# Altium PCB LMP9100.PcbDoc
Units mil, origin at the board's own origin, x right, y up, seen from the top; angles counter-clockwise.
Board outline 1322.96 x 990 mil, 4 copper layers (Top Layer, Int1 (GND), Int2 (PWR), Bottom Layer), stack 53.912 mil thick; 29 components, 32 nets, 136 pads, 44 vias.
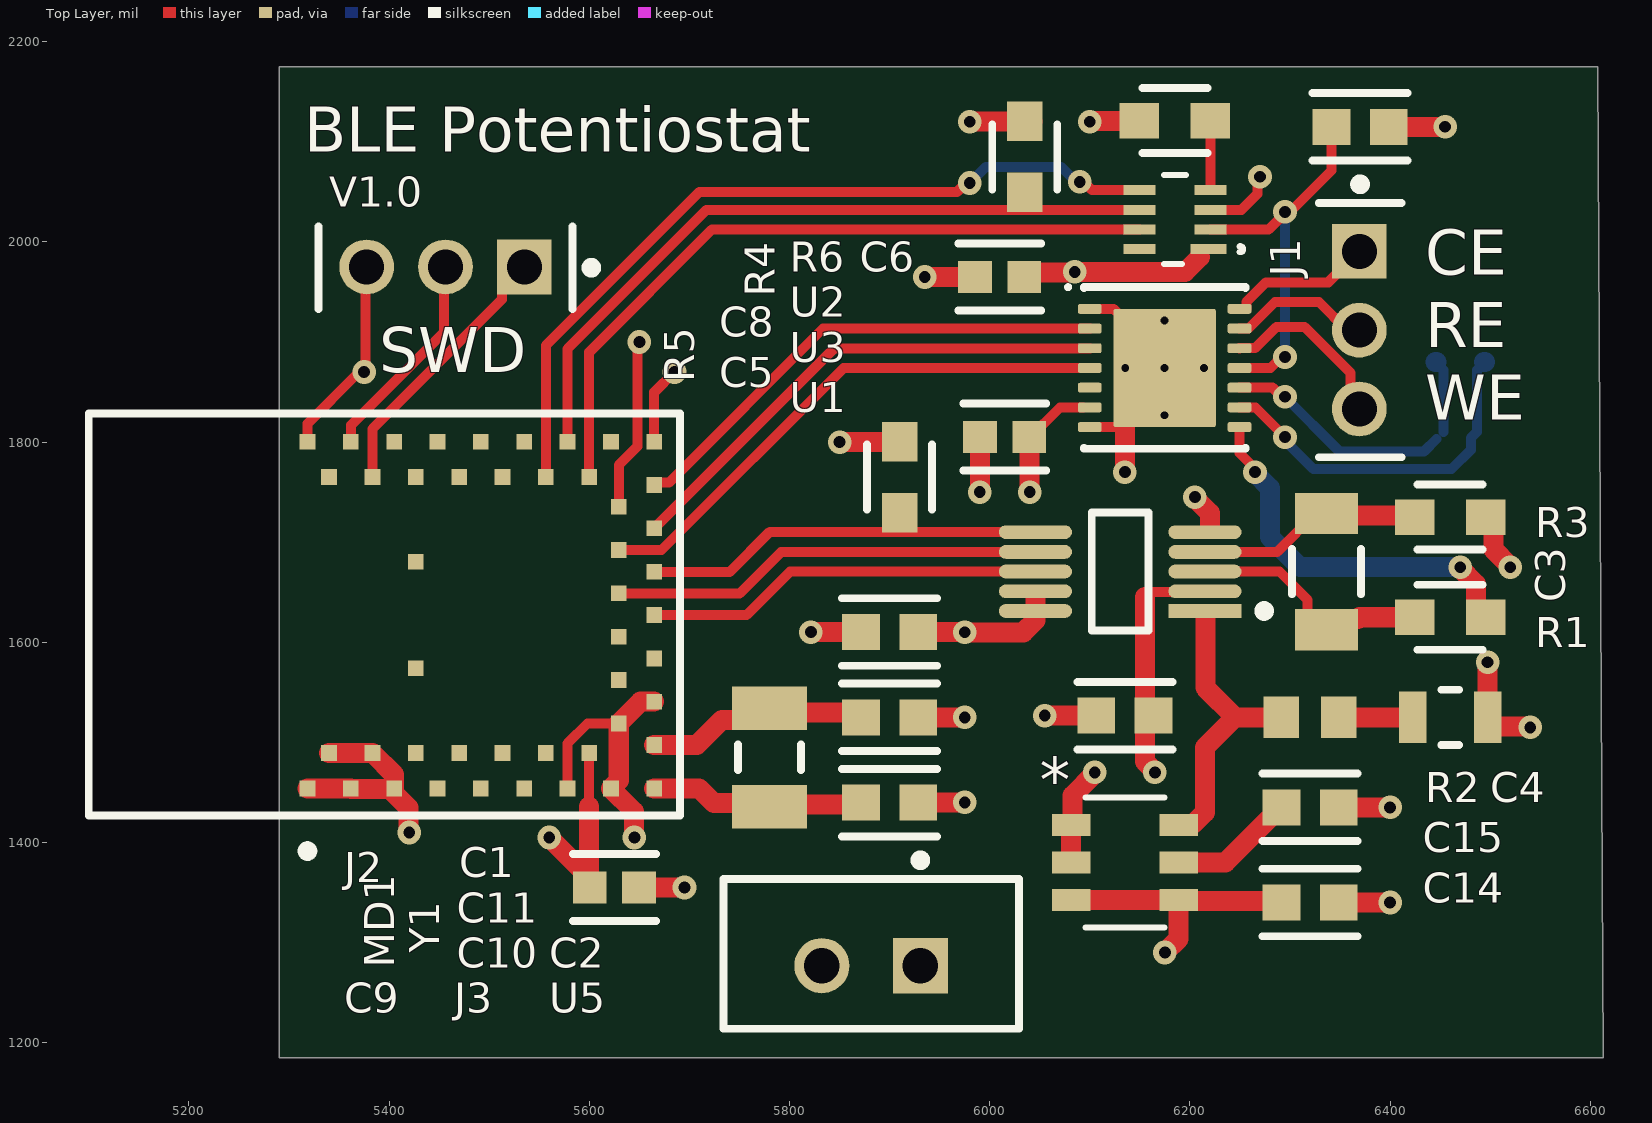
[diagram p0: Top Layer view]
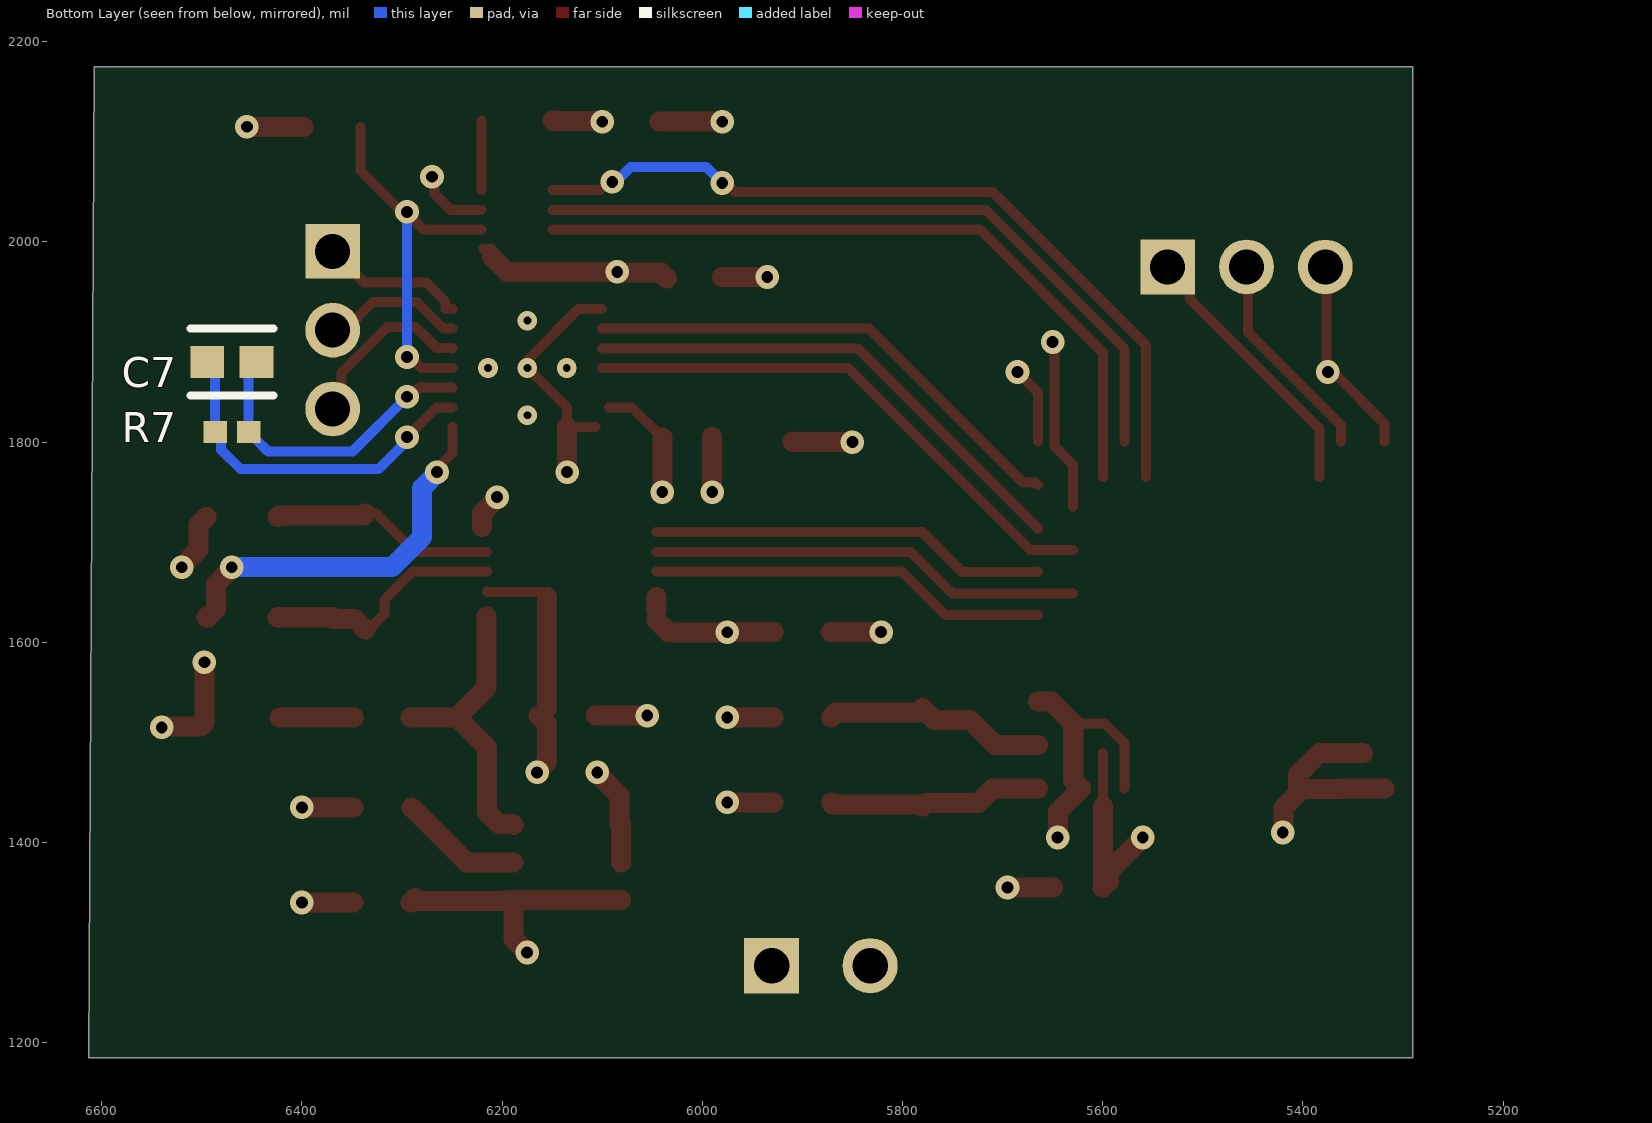
[diagram p1: Bottom Layer view, seen from below]
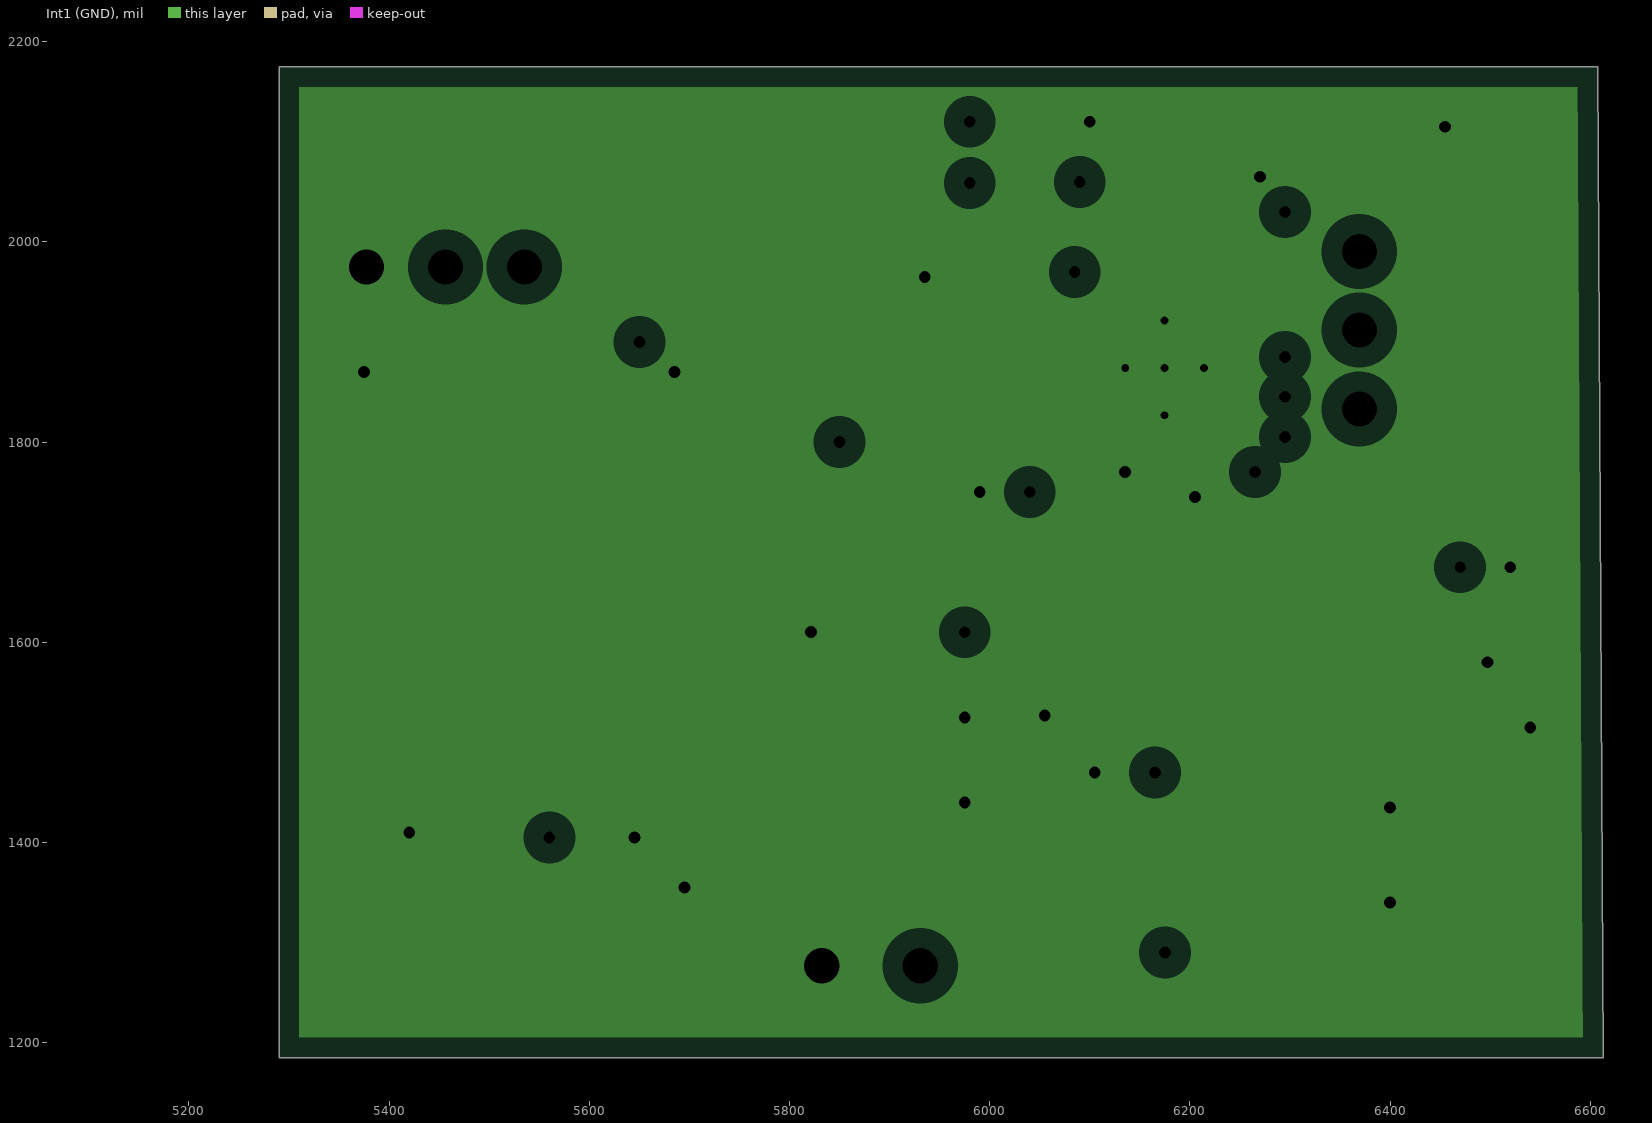
[diagram p2: Int1 (GND), clearances drawn from the general rule]
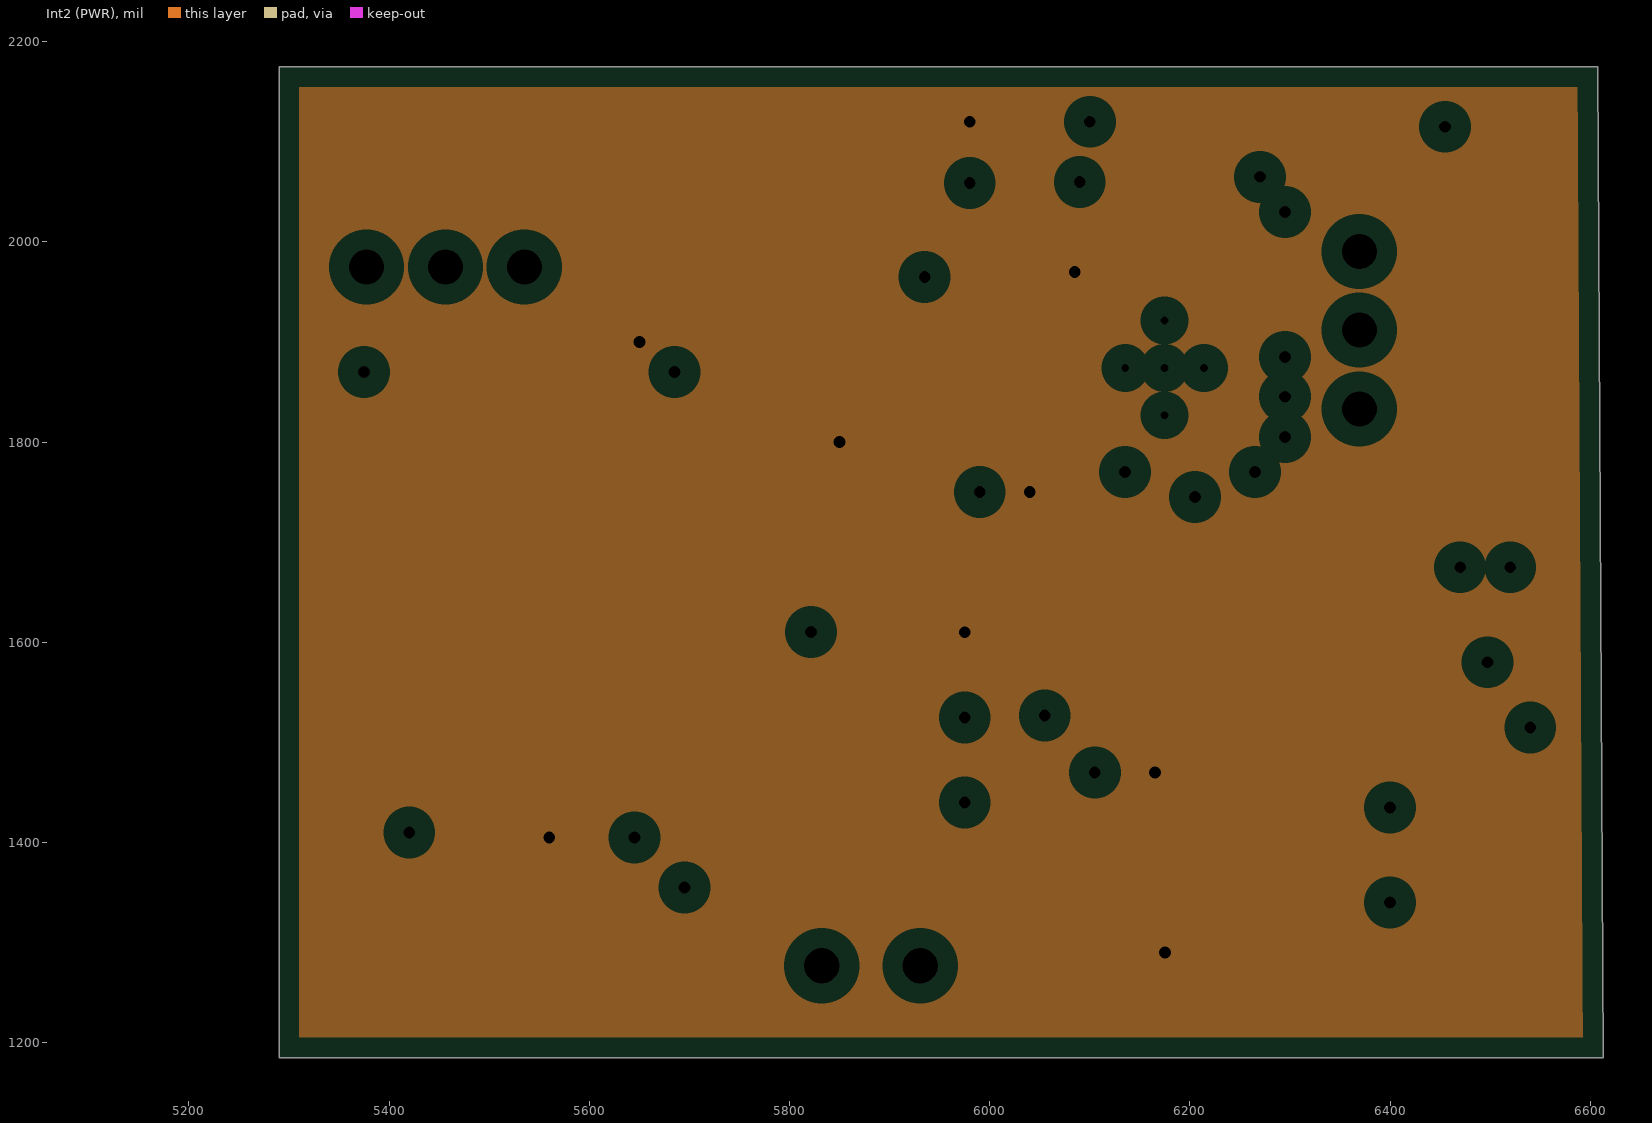
[diagram p3: Int2 (PWR), clearances drawn from the general rule]
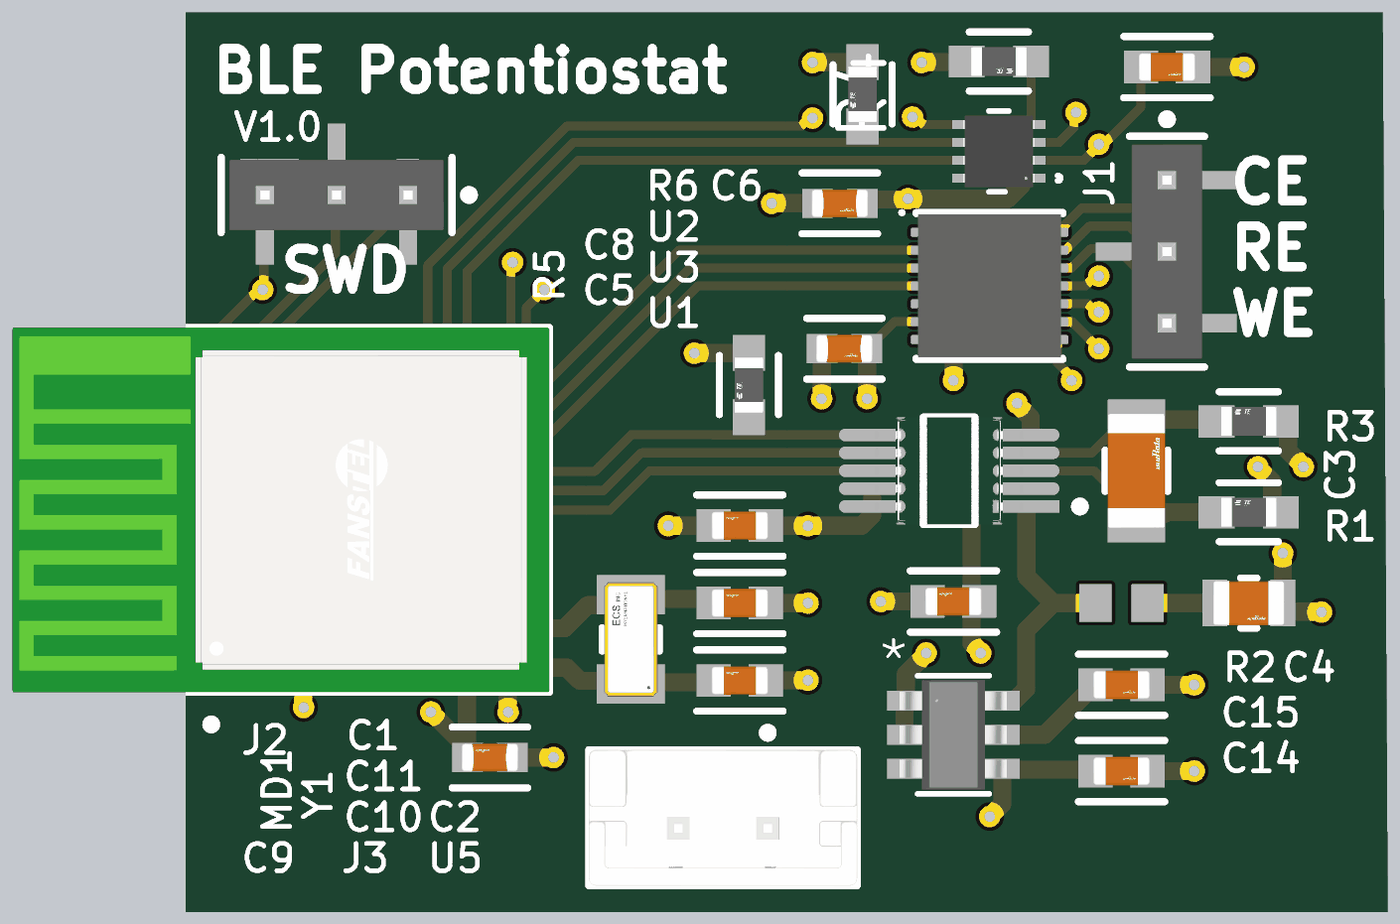
[diagram p4: 3D render of the assembled board from above, using the file's embedded part models]

## Layer stack, top to bottom
Top Solder: solder mask 1, SM-001, Dk 4
Top Layer: signal copper 1.378
Dielectric 1: prepreg 5.1, PP-017, Dk 4.3
Dielectric 2: prepreg 5.1, PP-017, Dk 4.3
Int1 (GND): plane copper 1.378, net GND
Dielectric 3: core 28, Core-039, Dk 4.8
Int2 (PWR): plane copper 1.378, net VCC
Dielectric 4: prepreg 5.1, PP-017, Dk 4.3
Dielectric 5: prepreg 5.1, PP-017, Dk 4.3
Bottom Layer: signal copper 1.378
Bottom Solder: solder mask 1, SM-001, Dk 4

## Board outline
6612.96,1185 5290,1185 5290,2175 6607.43,2175

## Design rules (kind name [scope] priority, off if disabled: settings)
Clearance [All] p1: gap=4 ignorepadtopadclearanceinfootprint=TRUE except(5: Arc-Via Track-Via SMDPad-Via THPad-Via Via-Via Via-Fill Via-Poly Via-Region Via-Text; 10: Arc-Hole Track-Hole SMDPad-Hole THPad-Hole Via-Hole Fill-Hole Poly-Hole Region-Hole Text-Hole)
MinimumSolderMaskSliver [All] p1: minsoldermaskwidth=8
PlaneClearance [All] p1: clearance=20
PlaneConnect [All] p1: planeconnectstyle=Relief reliefexpansion=20 reliefentries=4 reliefconductorwidth=10 reliefairgap=10
PolygonConnect [All] p1: connectstyle=Relief reliefconductorwidth=10 reliefentries=4 polygonreliefangle="90 Angle" airgapwidth=10
RoutingVias [All] p1: holewidth=28 width=50 viastyle="Through Hole" minholewidth=28 minwidth=50 maxholewidth=28 maxwidth=50
SolderMaskExpansion [All] p1: expansion=4 istentingtop=FALSE
Width [All] p1: maxlimit=20 minlimit=6 preferedwidth=10 minimp=50.000000 maximp=50.000000 favimp=50.000000
27 further rules are at their usual default settings.

## Classes and differential pairs
component class Power: C14 C15 J3 U5
component class MCU: C9 C10 C11 J2 MD1 Y1
component class Analog: C1 C2 C3 C4 C5 C6 C7 C8 J1 R1 R2 R3 R4 R5 R6 R7 U1 U2 U3

## Components (designator, comment, footprint, x,y, rotation, side; value= is the part's Value field where it differs from the comment)
C1 "1u" FP-GCM188-0_1-IPC_B 5900,1610.29 r180 top
C2 "1u" FP-GCM188-0_1-IPC_B 6135,1526.7 r180 top
C3 "0.1u (NPO)" FP-GRM319-0_15-MFG 6336.36,1670.63 r90 top
C4 "10u" FP-GRM21B-0_15-MFG 6460,1525 r0 top
C5 "0.1u (X7R)" FP-GCJ188-0_2-IPC_C 6015,1805 r0 top
C6 "1u" FP-GCM188-0_1-IPC_B 6370,2115 r0 top
C7 "(C)" FP-GCJ188-0_2-IPC_C 6470,1880 r180 bottom
C8 "0.1u (X7R)" FP-GCJ188-0_2-IPC_C 6010,1965 r0 top
C9 "0.1u (X7R)" FP-GCJ188-0_2-IPC_C 5625,1355 r180 top
C10 "12p" FP-GCM188-0_1-IPC_B 5900,1439.71 r180 top
C11 "12p" FP-GCM188-0_1-IPC_B 5900,1525 r180 top
C14 "1u" FP-GCM188-0_1-IPC_B 6320,1340 r0 top
C15 "1u" FP-GCM188-0_1-IPC_B 6320,1435.03 r0 top
J1 "TMM-103-03-T-S" FP-TMM-103-03-T-S-MFG 6370,1911.84 r270 top
J2 "TMM-103-03-T-S" FP-TMM-103-03-T-S-MFG 5456.26,1974.21 r180 top
J3 "B2B-EH-A(LF)(SN)" FP-B2B-EH-A_LF_SN-MFG 5881.48,1288.71 r180 top
MD1 "BM832A" FP-BM832A-MFG 5395.12,1627.6 r90 top
R1 "10k" FP-CPF0603-MFG 6460,1625 r0 top value=10KΩ
R2 "0.47" RESC1608X55X30ML15T15 6320,1525 r180 top
R3 "10k" FP-CPF0603-MFG 6460,1725 r0 top value=10KΩ
R4 "10k" FP-CPF0603-MFG 6035,2085 r90 top value=10KΩ
R5 "10k" FP-CPF0603-MFG 5910,1765 r90 top value=10KΩ
R6 "10k" FP-CPF0603-MFG 6185,2121.12 r180 top value=10KΩ
R7 "(R)" RESC1005X40X25NL05T10 6470,1810 r180 bottom
U1 "ADS8866IDGSR" FP-DGS0010A-IPC_A 6130.32,1670.63 r180 top
U2 "DAC80501MDQFR" WSON8_2P1X2P1_TEX 6185,2022.2 r180 top
U3 "LMP91000SDE/NOPB" NHL0014B_V 6174.74,1874.06 r0 top
U5 "PREF35125QDBVR" SOT23_DBV_TEX 6135,1380 r0 top
Y1 "32.7 kHz" FP-ECS-CDX-MFG 5780,1485 r90 top

## Footprints (in the part's own frame and the unit in brackets; to place one, negate y for a bottom-side part, rotate by r counter-clockwise, add the part's x,y. Pads: shape width x height; smd on the part's side, far side on the other; paste and mask are expansions set on the pad)
FP-B2B-EH-A_LF_SN-MFG [mm]
  rect 1.4x1.4 hole 0.9 paste-2539.97 mask+0: 1(-1.25,0.3)
  round 1.4 hole 0.9 paste-2539.97 mask+0: 2(1.25,0.3)
  silkscreen extent -3.75,-2.5 3.75,1.9, body extent -3.75,-1.9 3.75,1.9, height 6
FP-BM832A-MFG [mm]
  rect 0.4x0.4 smd paste+0 mask+0: 1(-4.41,1.95) 2(-3.51,1.4) 3(-4.41,0.85) 4(-3.51,0.3) 5(-4.41,-0.25) 6(-3.51,-0.8) 7(-4.41,-1.35) 8(-3.51,-1.9) 9(-4.41,-2.45) 10(-3.51,-3) 11(-4.41,-3.55) 12(-3.51,-4.1) 13(-4.41,-4.65) 14(-3.51,-5.2) 15(-4.41,-5.75) 16(-4.41,-6.85) 17(-3.31,-6.85) 18(-2.76,-5.95) 19(-2.21,-6.85) 20(-1.66,-5.95) 21(-1.11,-6.85) 22(-0.56,-5.95) 23(-0.01,-6.85) 24(0.54,-5.95) 25(1.09,-6.85) 26(1.64,-5.95) 27(2.19,-6.85) 28(2.74,-5.95) 29(3.29,-6.85) 30(4.39,-6.85) 31(4.39,-5.75) 32(3.49,-5.2) 33(4.39,-4.65) 34(3.49,-4.1) 35(4.39,-3.55) 36(3.49,-3) 37(4.39,-2.45) 38(3.49,-1.9) 39(4.39,-1.35) 40(3.49,-0.8) 41(4.39,-0.25) 42(3.49,0.3) 43(4.39,0.85) 44(3.49,1.4) 45(4.39,1.95) 46(1.34,-0.8) 47(-1.36,-0.8)
  silkscreen extent -6.12,-7.5 5.1,7.5, body extent -5.6,-8 5.6,8, height 0.25
FP-CPF0603-MFG [mm]
  rect 1x0.9 smd paste+0 mask+0: 1(-0.9,0) 2(0.9,0)
  silkscreen extent -0.82,-0.82 0.82,0.82, body extent -1.5,-0.55 1.5,0.55, height 0.25
FP-DGS0010A-IPC_A [mm]
  rect 1.857x0.35 smd paste+0 mask+0: 1(-2.151,1)
  rrect100% 1.857x0.35 smd paste+0 mask+0: 2(-2.151,0.5) 3(-2.151,0) 4(-2.151,-0.5) 5(-2.151,-1) 6(2.151,-1) 7(2.151,-0.5) 8(2.151,0) 9(2.151,0.5) 10(2.151,1)
  silkscreen extent -3.78,-1.5 0.72,1.5, body extent -3.58,-2 3.58,2, height 0.25
FP-ECS-CDX-MFG [mm]
  rect 1.1x1.9 smd paste+0 mask+0: 1(-1.25,0) 2(1.25,0)
  silkscreen extent -0.33,-0.8 0.33,0.8, body extent -1.9,-1.05 1.9,1.05, height 0.25
FP-GCJ188-0_2-IPC_C [mil]
  rect 33.67x31.97 smd paste+0 mask+0: 1(-24.63,0) 2(24.63,0)
  silkscreen extent -41,-33 41,33, body extent -31,-16 31,16, height 35
FP-GCM188-0_1-IPC_B [mil]
  rect 37.74x35.91 smd paste+0 mask+0: 1(-28.61,0) 2(28.61,0)
  silkscreen extent -47,-34 47,34, body extent -31,-16 31,16, height 35
FP-GRM21B-0_15-MFG [mm]
  rect 0.7x1.3 smd paste+0 mask+0: 1(-0.95,0) 2(0.95,0)
  silkscreen extent -0.23,-0.7 0.23,0.7, body extent -1.4,-0.8 1.4,0.8, height 0.25
FP-GRM319-0_15-MFG [mm]
  rect 1.05x1.6 smd paste+0 mask+0: 1(-1.475,0) 2(1.475,0)
  silkscreen extent -0.58,-0.87 0.58,0.87, body extent -2.1,-0.97 2.1,0.97, height 0.25
FP-TMM-103-03-T-S-MFG [mm]
  rect 1.39x1.39 hole 0.89 paste-2539.97 mask+0: 1(-2,-0.02)
  round 1.39 hole 0.89 paste-2539.97 mask+0: 2(0,-0.02) 3(2,-0.02)
  silkscreen extent -3.82,-1.05 3.22,1.05, body extent -3.1,-2.07 3.1,2.07, height 0.25
NHL0014B_V [mm] "SON, 10-Leads, Body 4x4mm, Pitch 0.5mm, Thermal Pad 3x2.6mm, TI Recommend"
  rrect40% 0.6x0.25 smd: 1(-1.9,1.5) 2(-1.9,1) 3(-1.9,0.5) 4(-1.9,0) 5(-1.9,-0.5) 6(-1.9,-1) 7(-1.9,-1.5) 8(1.9,-1.5) 9(1.9,-1) 10(1.9,-0.5) 11(1.9,0) 12(1.9,0.5) 13(1.9,1) 14(1.9,1.5)
  rrect4% 2.6x3 smd paste-1.3: 15(0,0)
  silkscreen extent -2.5,-2.05 2.05,2.1, body extent -2,-2 2,2, height 0.8
RESC1005X40X25NL05T10 [mm] "Chip Resistor, 2-Leads, Body 1.00x0.50mm, IPC Medium Density"
  rect 0.6x0.55 smd: 1(-0.425,0) 2(0.425,0)
  body extent -0.53,-0.27 0.53,0.28, height 0.4
RESC1608X55X30ML15T15 [mm] "Chip Resistor, 2-Leads, Body 1.60x0.80mm, IPC Low Density"
  rect 0.9x1.05 smd: 1(-0.725,0) 2(0.725,0)
  body extent -0.87,-0.48 0.87,0.48, height 0.55
SOT23_DBV_TEX [mil]
  rect 38.5x22 smd paste+0 mask+0: 1(-53.75,37.4) 2(-53.75,0) 3(-53.75,-37.4) 4(53.75,-37.4) 5(53.75,0) 6(53.75,37.4)
  silkscreen extent -40,-65 40,65, body extent -59,-60 59,60, height 57
WSON8_2P1X2P1_TEX [mil]
  rect 36x10 smd paste+0 mask+0: 1(-33.43,29.53)
  rect 32x10 smd paste+0 mask+0: 2(-35.43,9.84) 3(-35.43,-9.84) 4(-35.43,-29.53) 5(35.43,-29.53) 6(35.43,-9.84) 7(35.43,9.84) 8(35.43,29.53)
  silkscreen extent -68,-44 11,44, body extent -39,-39 39,39, height 32

## Part data
C1 C2 C6 C14 C15: library part CMP-2006-02357-2, "Ceramic Capacitor for Automotive 1uF  ±10% 16VDC X7R 0603 Paper T/R", Capacitance=1uF, Case Code (Imperial)=0603, Case Code (Metric)=1608, Dielectric=X7R, Max Operating Temperature=125°C, Min Operating Temperature=-55°C, Package Quantity=1, Ratings=AEC-Q200, Tolerance=10%, Voltage=16V, Case/Package=0603, Depth=0.8mm, Height=0.8mm, Lead Free="Lead Free", Length=1.6mm, Mount="Surface Mount", Packaging="Tape and Reel", Radiation Hardening=No, REACH SVHC="No SVHC", Termination=SMD/SMT, Thickness=0.035inch, Voltage Rating=16V, Voltage Rating (DC)=16V, Width=0.031inch
C3: library part CMP-06035-028588-1, "Chip Multilayer Ceramic Capacitors for General Purpose, 1206, 0.10uF, C0G, 30ppm/°C, 5%, 50V"
C4: library part CMP-2000-07555-2, "Chip Multilayer Ceramic Capacitors for General Purpose, 0805, 10uF, X7R, 15%, 10%, 10V", Capacitance=10uF, Case Code (Imperial)=0805, Case Code (Metric)=2012, Dielectric=X7R, Max Operating Temperature=125°C, Min Operating Temperature=-55°C, Package Quantity=3000, Tolerance=10%, Voltage Rating=10V, Case/Package=0805, Depth=1.25mm, Height=1.25mm, Length=2mm, Mount="Surface Mount", Packaging="Tape and Reel", REACH SVHC="No SVHC", Termination=SMD/SMT, Thickness=0.055inch, Voltage Rating (DC)=10V, Weight=0.000335oz, Width=1.25mm
C5 C7 C8 C9: library part CMP-2006-02223-2, "Cap Ceramic 0.1uF 50V X7R 10% Pad SMD 0603 Soft Termination +125°C Automotive T/R", Capacitance=100nF, Case Code (Imperial)=0603, Case Code (Metric)=1608, Dielectric=X7R, Max Operating Temperature=125°C, Min Operating Temperature=-55°C, Package Quantity=1, Ratings=AEC-Q200, Tolerance=10%, Voltage Rating=50V, Case/Package=0603, Depth=0.8mm, Features="Soft Termination", Height=0.8mm, Lead Free="Lead Free", Length=1.6mm, Mount="Surface Mount", Packaging="Tape and Reel", Radiation Hardening=No, Termination=SMD/SMT, Thickness=0.035inch, Voltage Rating (DC)=50V, Width=0.031inch
C10 C11: library part CMP-06035-018127-1, "Ceramic Capacitor for Automotive 12pF  ±1% 100VDC C0G 0603 Paper T/R"
J1 J2: library part CMP-02766-001695-1, "CONN HEADER VERT 3POS 2MM", Color=Black, Max Current Rating=3.9A, Max Operating Temperature=105°C, Max Voltage Rating (AC)=500V, Min Operating Temperature=-55°C, Package Quantity=1, Connector Type=Header, Contact Finish - Mating=TIN, Contact Material=Bronze, Contact Mating Length=0.157inch, Contact Plating=Tin, Contact Shape=Square, Contact Type="Male Pin", Depth=1.97mm, Fastening Type=Pull, Gender=Male, Housing Color=Black, Housing Material=Polymer, Insulation Color=Black, Insulation Material=Polymer, Lead Free="Lead Free", Length=6mm, Mount="Through Hole", Number of Contacts=3, Number of Positions=3, Number of Rows=1, Orientation=Straight, Packaging=Bulk, Pitch=2mm, Radiation Hardening=No, REACH SVHC="No SVHC", RoHS Compliant=Yes, Series=TMM, Termination=Solder
J3: library part CMP-17439-000026-1, "CONN HEADER VERT 2POS 2.5MM", Color=Natural, Contact Resistance=20mR, Current Rating=3A, Housing Color=White, Max Operating Temperature=85°C, Max Voltage Rating (AC)=250V, Min Operating Temperature=-25°C, Connector Type=Plug, Contact Material="Copper Alloy", Contact Mating Length=0.13inch, Contact Plating=Tin, Contact Type="Male Pin", Depth=3.8mm, Fastening Type=Detent, Gender=Male, Housing Material=Nylon, Lead Free="Lead Free", Length=7.5mm, Max Current Rating=3A, Mount="Through Hole", Number of Contacts=2, Number of Positions=2, Number of Rows=1, Orientation=Straight, Packaging=Bulk, Pitch=2.5mm, Series=EH, Termination=Press-Fit, Voltage Rating=250V
MD1: library part CMP-216577-000005-1, "RX TXRX MODULE BT PCB TRC SMD", Case/Package=SMD/SMT, Frequency=2.4GHz, Max Operating Temperature=85°C, Min Operating Temperature=-40°C, Data Rate=1Mbps, Interface=I2C, Memory Size=24KB, Mount="Surface Mount", Sensitivity=-96dBm, Series=-
R1 R3 R4 R5 R6: library part CMP-03211-008304-1, "RES SMD 10KΩ 1% 1/16W 0603", Manufacturer="TE Connectivity", Manufacturer Part Number=CPF0603F10KC1, Package=CPF0603, Power Rating=0.063W, Resistance=10KΩ, Temperature="-55°C to +155°C", Temperature Coefficient=50ppm/°C, Temperature Range High=+155°C, Temperature Range Low=-55°C, Tolerance=1%, Voltage Rating=50V, Automotive=No, Category=Res, ComponentLink2Description=Datasheet, ComponentLink2URL=https://www.te.com/commerce/DocumentDelivery/DDEController?Action=showdoc&DocId=Data+Sheet%7F1773200%7FM%7Fpdf%7FEnglish%7FENG_DS_1773200_M.pdf%7F3-1676481-2, Composition="Thin Film", Device Class L1="Passive Components", Device Class L2=Resistors, Device Class L3="Chip SMD Resistors", Height=0.55mm, Ipc Land Pattern Name=RESC15580X45, Lead Free=Yes, Octopart=https://octopart.com/cpf0603f10kc1-te+connectivity-42013076, octopart_url=https://octopart.com/cpf0603f10kc1-te+connectivity-42013076, Packaging="1k Reel", RoHS=TRUE, Series=CPF
R2: library part CMP-2000-00857-1, Manufacturer=Panasonic, Part Number=ERJ-3RQFR47V
R7: library part CMP-2002-07044-1, Manufacturer="Yageo / Phycomp", Part Number=RC0402FR-073M3L
U1: library part CMP-04860-000035-1, "IC ADC 16BIT SAR 10VSSOP", Case/Package=VSSOP, Max Operating Temperature=85°C, Max Power Dissipation=1.2mW, Max Supply Voltage=3.6V, Min Operating Temperature=-40°C, Min Supply Voltage=2.7V, Nominal Supply Current=230uA, Package Quantity=2500, Power Dissipation=700uW, Contact Plating=Gold, Integral Nonlinearity (INL)=2LSB, Interface=SPI, Lead Free="Lead Free", Mount="Surface Mount", Number of A/D Converters=1, Number of Analog Inputs=1, Number of Bits=16, Number of Inputs=1, Number of Pins=10, Packaging="Cut Tape", Polarity=Unipolar, REACH SVHC="No SVHC", Resolution=16b, RoHS Compliant=Yes, Sampling Rate=100000S/s, Signal to Noise Ratio (SNR)=93dB, Supply Type=Analog
U2: "True 16-bit, 1-ch, SPI/I2C, voltage-output DAC in WSON package with precision internal reference", Mfr_Name="Texas Instruments", Supplier Part Number 1=595-DAC80501MDQFR, RefDes=RefDes, Supplier 1=Mouser, Type=Type
U3: library part CMP-0064-00201-2, "Configurable AFE Potentiostat for Low-Power Chemical Sensing Applications, 14-pin LLP, 250 Reel", Manufacturer="Texas Instruments", PackageTopMarking=NS*UZXYTT*L91000, PowerWise=N, ComponentLink1Description="Datasheet URL", ComponentLink1URL=http://www.ti.com/general/docs/lit/getliterature.tsp?genericPartNumber=LMP91000&fileType=pdf, CompType=OtherParts, PackageDescription="LLP, Plastic, Dual, 4 x 4 x 0.8mm Body, 14 Lead, 0.5mm Pitch, No Pullback", PackageReference=NHL0014B, PinCount=14, RoHS=Y
U5: "650-nA quiescent current, 12-ppm/°C drift, ultra-low-power precision voltage reference", Mfr_Name="Texas Instruments", Supplier Part Number 1=296-REF35300QDBVRCT-ND, RefDes=RefDes, Supplier 1=Digikey, Type=Type
Y1: library part CMP-40224-000016-1, "CRYSTAL 32.7680KHZ 12.5PF SMD", Case/Package=SMD/SMT, ESR (Equivalent Series Resistance)=70kR, Frequency=32.768kHz, Frequency Tolerance=5ppm, Load Capacitance=12.5pF, Max Operating Temperature=85°C, Min Operating Temperature=-40°C, Mount="Surface Mount", Packaging="Tape and Reel"

## Via types
v1: diameter 23.62, hole 11.81, Top Layer to Bottom Layer, 39 vias
v2: diameter 19.68, hole 7.87, Top Layer to Bottom Layer, 5 vias

## Nets (pads, with @x,y where several pads share a name; then routed paths per layer and width w, separated by ;. In a path a pad name is that pad's centre, name@x,y a point inside that pad or via, vN(x,y) a via of type N, cw(c..) or ccw(c..) an arc to the next point about the centre after c; other vN are vias at no path point)
ADC_CS: MD1.25 R5.1 U1.6 | length 397.9
  Top Layer w10: MD1.25 5665,1670.31 5665,1670 5740,1670 5780.31,1710.31 5870,1710.31 ; 5870,1710 U1.6
ADC_MOSI: MD1.24 U1.7 | length 433.4
  Top Layer w10: MD1.24 5750.17,1648.86 5791.62,1690.31 U1.7
ADC_SCLK: MD1.23 U1.8 | length 398.8
  Top Layer w10: MD1.23 5757.2,1627.2 5800.63,1670.63 U1.8
AFE_EN: MD1.29 U3.2 | length 499.9
  Top Layer w10: MD1.29 5667.12,1759.45 5679.45,1759.45 5833.43,1913.43 U3.2
AFE_OUT: R1.2 U3.8 | length 386.7
  Top Layer w10: U3.8 6249.54,1789.14 6265,1773.69 v1(6265,1770)
  Top Layer w20: v1(6470,1675) 6470,1674.02 6485.75,1658.27 6485.75,1632.72 6493.46,1625 R1.2
  Bottom Layer w20: v1(6265,1770) 6265,1769.02 6280,1754.02 6280,1705 6310,1675 v1(6470,1675)
AFE_SCL: MD1.27 U3.3 | length 509.7
  Top Layer w10: MD1.27 5844.72,1893.74 U3.3
AFE_SDA: MD1.26 U3.4 | length 545.9
  Top Layer w10: MD1.26 5672.17,1692.17 5854.06,1874.06 U3.4
AINN: C3.2 R3.1 U1.4 | length 227
  Top Layer w10: U1.4 6287.15,1690.31 6325.53,1728.7 C3.2
  Top Layer w20: C3.2 6338.21,1726.85 6422.72,1726.85 R3.1
AINP: C3.1 R1.1 U1.3 | length 247.1
  Top Layer w10: U1.3 6289.37,1670.63 6317.63,1642.37 6317.63,1628.23 6333.3,1612.56 C3.1
  Top Layer w20: C3.1 6347.03,1623.23 6367.8,1623.23 6369.57,1625 R1.1
BATT+: J3.1
CE: J1.1 U3.14 | length 147.4
  Top Layer w10: U3.14 6256.27,1933.11 6256.35,1933.19 6256.35,1939.92 6276.09,1959.66 6338.3,1959.66 J1.1
DAC_CS: MD1.33 R4.1 U2.6 | length 721.6
  Top Layer w10: MD1.33 5578.19,1893.19 5717.04,2032.04 U2.6
DAC_MOSI: MD1.32 U2.7 | length 725.3
  Top Layer w10: MD1.32 5599.84,1889.84 5722.35,2012.35 U2.7
DAC_OUT: C6.1 U2.2 U3.11 | length 384
  Top Layer w10: U2.2 6278.67,2012.35 6296.31,2030 6300,2030 6341.39,2071.39 C6.1 ; U3.11 6280.37,1874.06 6291.31,1885 v1(6295,1885)
  Bottom Layer w10: v1(6295,1885) v1(6295,2030)
DAC_SCLK: MD1.34 U2.5 | length 808.1
  Top Layer w10: MD1.34 5556.54,1896.54 5710,2050 5967.47,2050 5976.31,2058.85 v1(5980,2058.85) ; v1(6090,2060) 6093.69,2060 6101.96,2051.72 U2.5
  Bottom Layer w10: v1(5980,2058.85) 5996.15,2075 6071.31,2075 6086.31,2060 v1(6090,2060)
EN: 
GND: C1.2 C2.2 C4.2 C5.1 C6.2 C8.1 C9.1 C10.1 C11.1 C14.2 C15.2 J2.3 J3.2 MD1.1 MD1.2 MD1.3 MD1.4 MD1.5 MD1.13 MD1.15 MD1.18 MD1.19 MD1.30 MD1.45 R3.2 R6.2 U1.5 U2.3 U3.1 U3.7 U3.15 U5.1 U5.2 | length 1945.4
  Top Layer w10: MD1.45 5318.35,1818.35 5367.39,1867.39 5372.39,1867.39 v1(5375,1870) 5376.26,1871.26 5376.26,1973.74 J2.3 ; MD1.13 5578.19,1499.06 5598.07,1518.94 MD1.18 ; MD1.30 5664.8,1849.8 v1(5685,1870) ; U3.1 6123.56,1933.11 6174.74,1881.93 v2(6174.74,1874.06) 6135.21,1834.53 6135.21,1815.21 6108.76,1815.21 6108.63,1815.08 U3.7@6106.75,1815.08 ; U2.3 6251.43,2032.04 6267.39,2048 6267.39,2062.39 v1(6270,2065)
  Top Layer w20: MD1.1 MD1.3 ; MD1.2 MD1.4 5404.96,1467.76 MD1.5 ; MD1.3@5362.05,1453.58 5400.39,1453.58 5419.31,1434.67 5419.31,1410.69 v1(5420,1410) ; v1@5644.51,1406.47 5644.51,1430.97 MD1.15 5629.37,1461.85 MD1.18 5651.02,1540.59 MD1.19 ; C9.1 v1(5695,1355) ; v1(5821.35,1610.15) 5821.42,1610.22 5871.32,1610.22 C1.2 ; C10.1 5928.76,1439.85 5974.85,1439.85 v1(5975,1440) ; C11.1 v1(5975,1525) ; v1(5935,1965) C8.1@5980.37,1965 ; v1(5990,1750) 5990.19,1750.19 5990.19,1804.81 C5.1 ; v1(6055,1526.7) C2.2 ; U5.2 U5.1 6081.66,1417.4 6082.66,1418.4 6082.66,1446.68 6105,1469.02 v1(6105,1470) ; v1(6100,2120) 6100.56,2120.56 6149.01,2120.56 R6.2 ; v1(6135,1770) 6135.21,1770.21 U3.15@6135.21,1815.21 ; v1(6205,1745) 6205,1744.02 6220,1729.02 U1.5@6220,1715 ; C14.2 v1(6400,1340) ; C15.2 v1(6400,1435) ; C6.2 v1(6455,2115) ; R3.2 6503.07,1717.37 6503.07,1692.81 v1@6519.31,1676.57 ; v1@6497.4,1576.62 C4.2 6497.4,1519.47 6501.18,1515.69 6539.31,1515.69 v1(6540,1515)
  other v1: 5645,1405 6497.4,1580 6520,1675
  other v2: 6174.74,1826.81 6135.37,1874.06 6214.11,1874.06 6174.74,1921.3
NetC4_1: C4.1 R2.1 | length 74.1
  Top Layer w20: R2.1 C4.1
NetC7_1: C7.1 R7.1 U3.9 | length 361.4
  Top Layer w10: U3.9 6249.62,1834.61 6265.39,1834.61 v1(6295,1805)
  Bottom Layer w10: v1(6295,1805) 6295,1801.31 6323.31,1773 6461.46,1773 6480.67,1792.21 6480.67,1804.17 6486.5,1810 R7.1 6486.73,1872.11 C7.1
  Bottom Layer w20: C7.1@6493.78,1880 C7.1
NetC7_2: C7.2 R7.2 U3.10 | length 302.8
  Top Layer w10: U3.10 6282.68,1854.37 6291.68,1845.38 v1(6295,1845.38)
  Bottom Layer w10: v1(6295,1845.38) 6295,1845 6349.26,1790.74 6434,1790.74 R7.2@6446.46,1803.19 ; C7.2 6453.27,1872.11 R7.2
  Bottom Layer w20: C7.2 C7.2@6446.22,1880
NetC10_2: C10.2 MD1.16 Y1.1 | length 215.7
  Top Layer w20: MD1.16 5709.78,1453.98 5724.31,1439.44 5776.35,1439.44 Y1.1 5781.96,1437.75 5869.43,1437.75 C10.2
NetC11_2: C11.2 MD1.17 Y1.2 | length 225.7
  Top Layer w20: MD1.17 5707.28,1497.28 5732.56,1522.56 5768.35,1522.56 Y1.2 5784.61,1529.61 5866.78,1529.61 C11.2
NetC15_1: C15.1 U5.5 | length 125.4
  Top Layer w10: C15.1@6290.47,1435.03 C15.1
  Top Layer w20: U5.5 6235.45,1380 C15.1@6290.47,1435.03
NetL1_2: 
NetR6_1: R6.1 U2.4 | length 69.4
  Top Layer w10: U2.4 R6.1
NetR8_1: 
RE: J1.2 U3.13 | length 142.3
  Top Layer w10: U3.13 6249.62,1913.5 6258.5,1913.5 6285,1940 6328.95,1940 6357.11,1911.84 J1.2
SWDCLK: J2.1 MD1.42 | length 272.8
  Top Layer w10: MD1.42 5383.31,1813.31 5512.64,1942.64 5512.64,1952.64 J2.1
SWDIO: J2.2 MD1.43 | length 219.4
  Top Layer w10: MD1.43 5362.02,1800.8 5362.02,1817.02 5455,1910 5455,1960 J2.2@5470,1975
VCC: C1.1 C2.1 C5.2 C8.2 C9.2 C14.1 MD1.14 MD1.28 R4.2 R5.2 U1.2 U1.9 U1.10 U2.1 U3.6 U5.3 U5.4 | length 1463.3
  Top Layer w10: 5599.84,1435.84 MD1.14 ; MD1.28 5629.37,1777 5647.93,1795.56 5647.93,1897.93 v1(5650,1900) ; C5.2@6039.81,1804.34 6070.16,1834.68 U3.6@6093.12,1834.68 ; 6045.64,1622.01 U1.10 ; 6155,1645 6160.22,1650.22 6214.28,1650.22 U1.2 ; 6210,1985 6210,1992.67 U2.1
  Top Layer w20: v1(5560,1405) 5593.54,1371.46 5593.54,1360.99 5594.39,1360.99 C9.2 ; C9.2@5599.84,1355.53 5599.84,1435.84 ; v1(5850,1800) 5850.22,1800.22 5909.78,1800.22 R5.2 ; C1.1 5928.76,1610.15 5974.85,1610.15 v1(5975,1610) 6033.63,1610 6045.64,1622.01 ; v1(5980,2120) 5980.22,2120.22 R4.2@6042.72,2120.22 ; C8.2@6035.47,1963.32 6041.46,1969.31 6084.31,1969.31 v1(6085,1970) 6195,1970 6210,1985 ; C5.2@6039.81,1804.34 6039.81,1750.19 v1(6040,1750) ; U1.10 U1.9@6045.64,1645 ; U5.3 U5.4 6188.75,1303.75 v1(6175,1290) ; C2.1@6155,1534.66 6155,1645 ; C2.1 6162.96,1526.7 6155,1518.75 6155,1480.98 6165,1470.98 v1(6165,1470) ; U5.4@6197,1342.6 6198,1341.6 6284.38,1341.6 6287.08,1344.31 C14.1
VREF: R2.2 U1.1 U5.6 | length 298.2
  Top Layer w20: U5.6 6189.75,1418.4 6203.28,1418.4 6215,1430.12 6215,1495 6245,1525 ; U1.1@6215.38,1625.63 6215.38,1554.62 6245,1525 ; R2.2 6245,1525
WE: J1.3 U3.12 | length 178.4
  Top Layer w10: U3.12 6249.62,1893.82 6265.13,1893.82 6286.31,1915 6314.63,1915 6360.65,1868.97 6360.65,1841.66 J1.3
pads on no net: MD1.6 MD1.7 MD1.8 MD1.9 MD1.10 MD1.11 MD1.12 MD1.20 MD1.21 MD1.22 MD1.31 MD1.35 MD1.36 MD1.37 MD1.38 MD1.39 MD1.40 MD1.41 MD1.44 MD1.46 MD1.47 U2.8 U3.5

## Polygon pours and split planes (outlines as drawn)
GND on Int1 (GND) (split plane): 6592.75,1205.1 5310.1,1205.1 5310.1,2154.9 6587.45,2154.9
VCC on Int2 (PWR) (split plane): 6592.75,1205.1 5310.1,1205.1 5310.1,2154.9 6587.45,2154.9

## Silkscreen, mask and mechanical layers (free items; w line width, h text height)
Top Overlay:
  text "BLE Potentiostat" at 5315,2090 h45
  text "V1.0" at 5340,2035 h30
  text "CE" at 6435,1967.29 h45
  text "RE" at 6435,1894.79 h45
  text "SWD" at 5390,1870 h45
  text "WE" at 6435,1822.29 h45

## Text inside footprints (layer, text, board x,y; h text height)
U5: Top Overlay "*" at 6050,1440 h45; Mechanical 13 "*" at 6103,1387 h45